# Altium PCB OTTO.PcbDoc (part 1 of 2)
Units mil, origin at the board's own origin, x right, y up, seen from the top; angles counter-clockwise.
Board outline 6000 x 4000 mil, 4 copper layers (Top Layer, Signal Layer 1, Signal Layer 2, Bottom Layer), stack 30.634 mil thick; 140 components, 89 nets, 485 pads, 197 vias.
Unrouted connection lines stored in the file: 9.
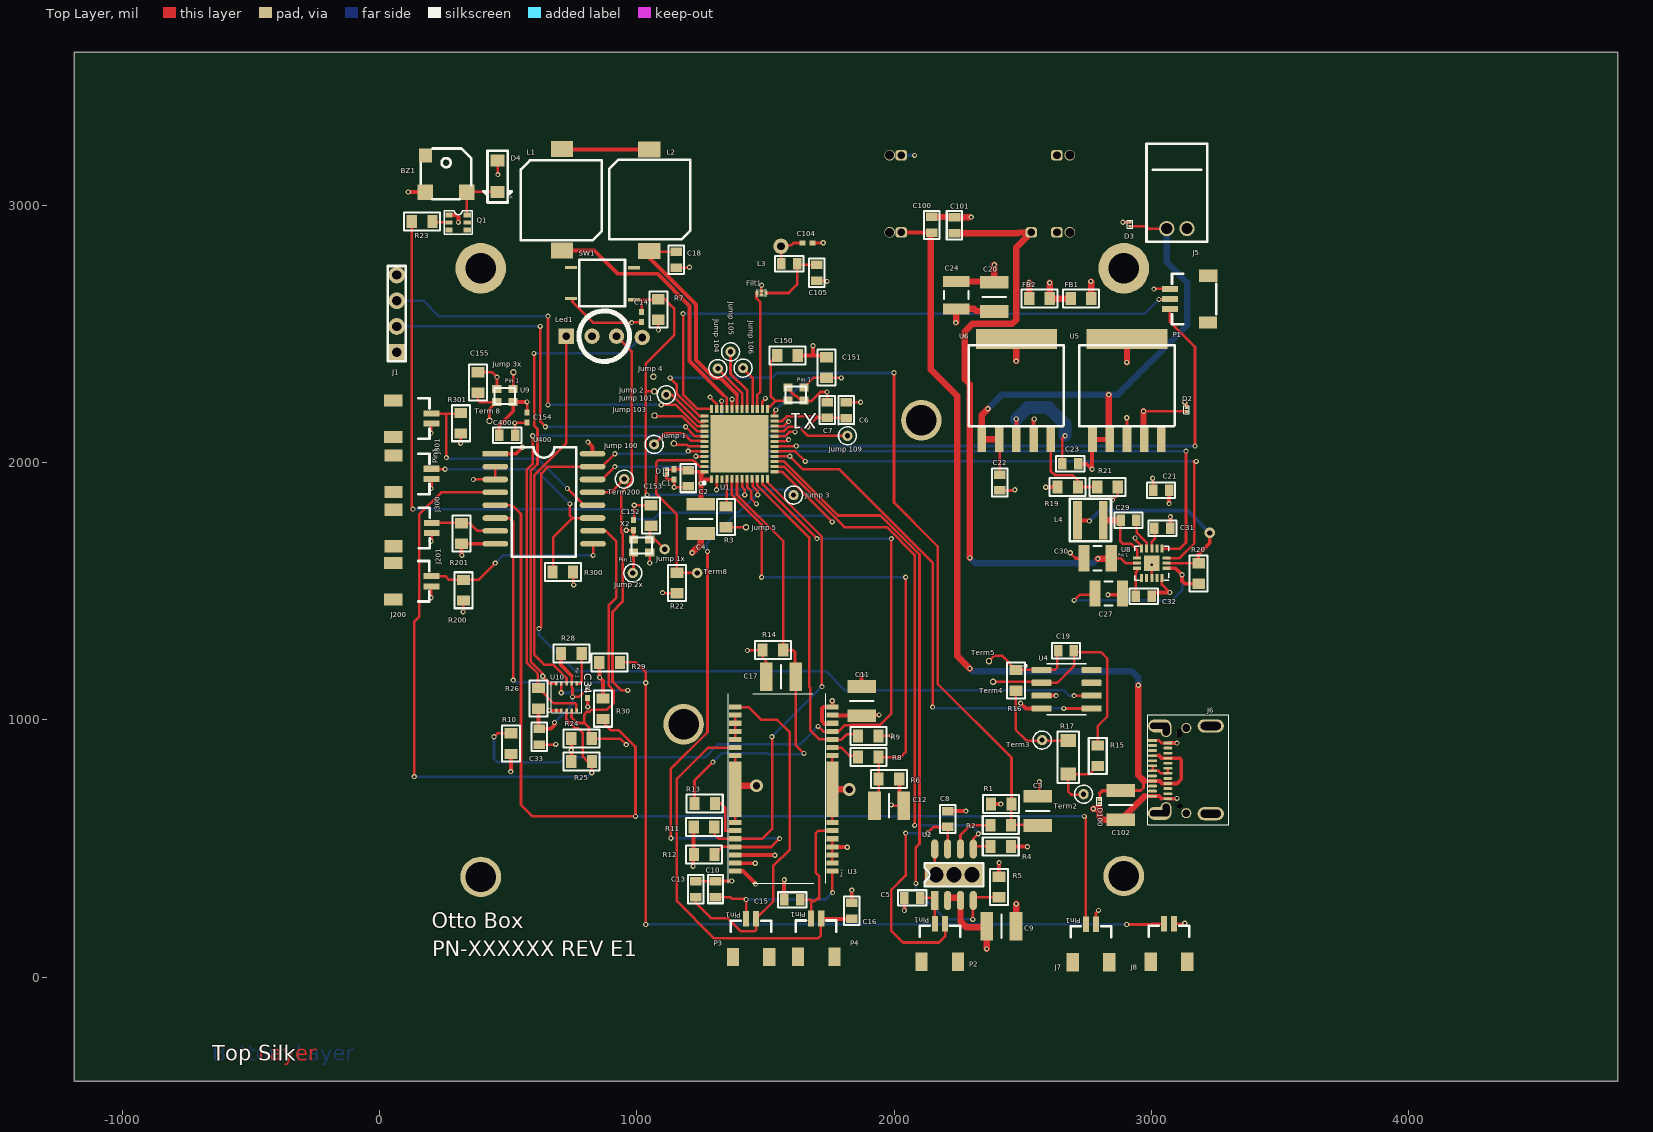
[diagram p0: Top Layer view]
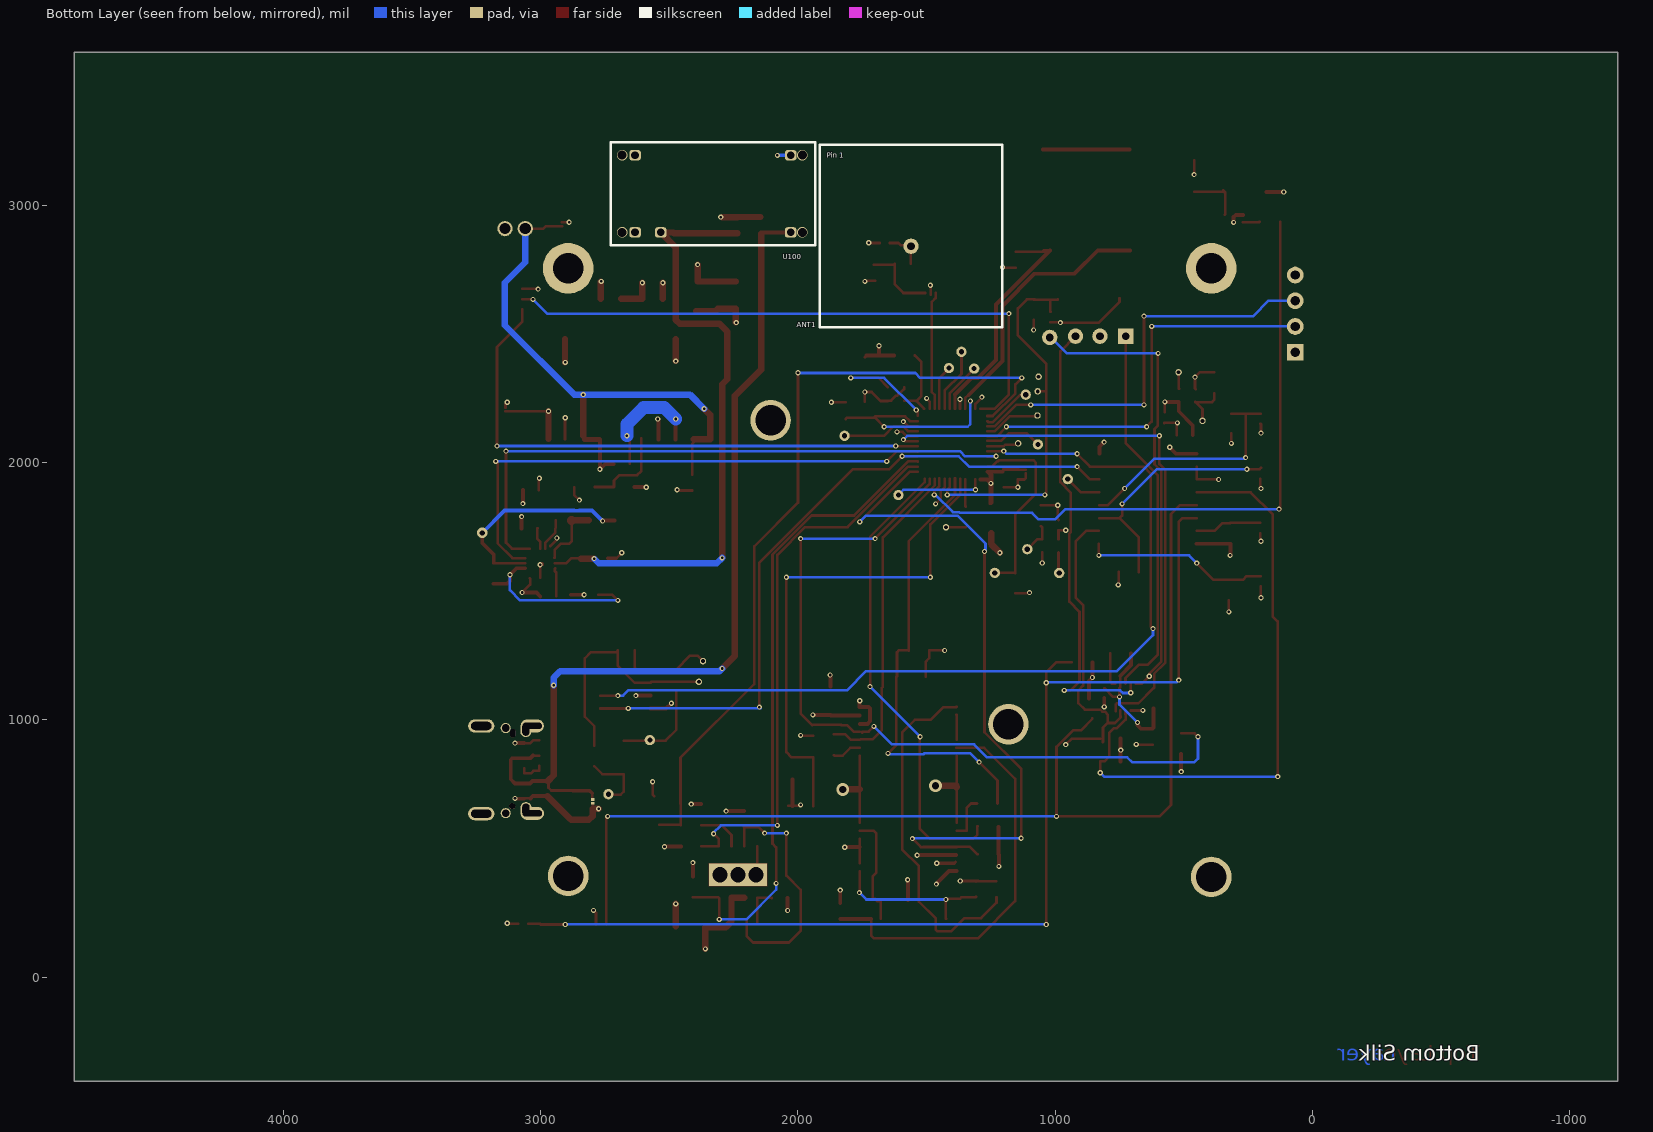
[diagram p1: Bottom Layer view, seen from below]
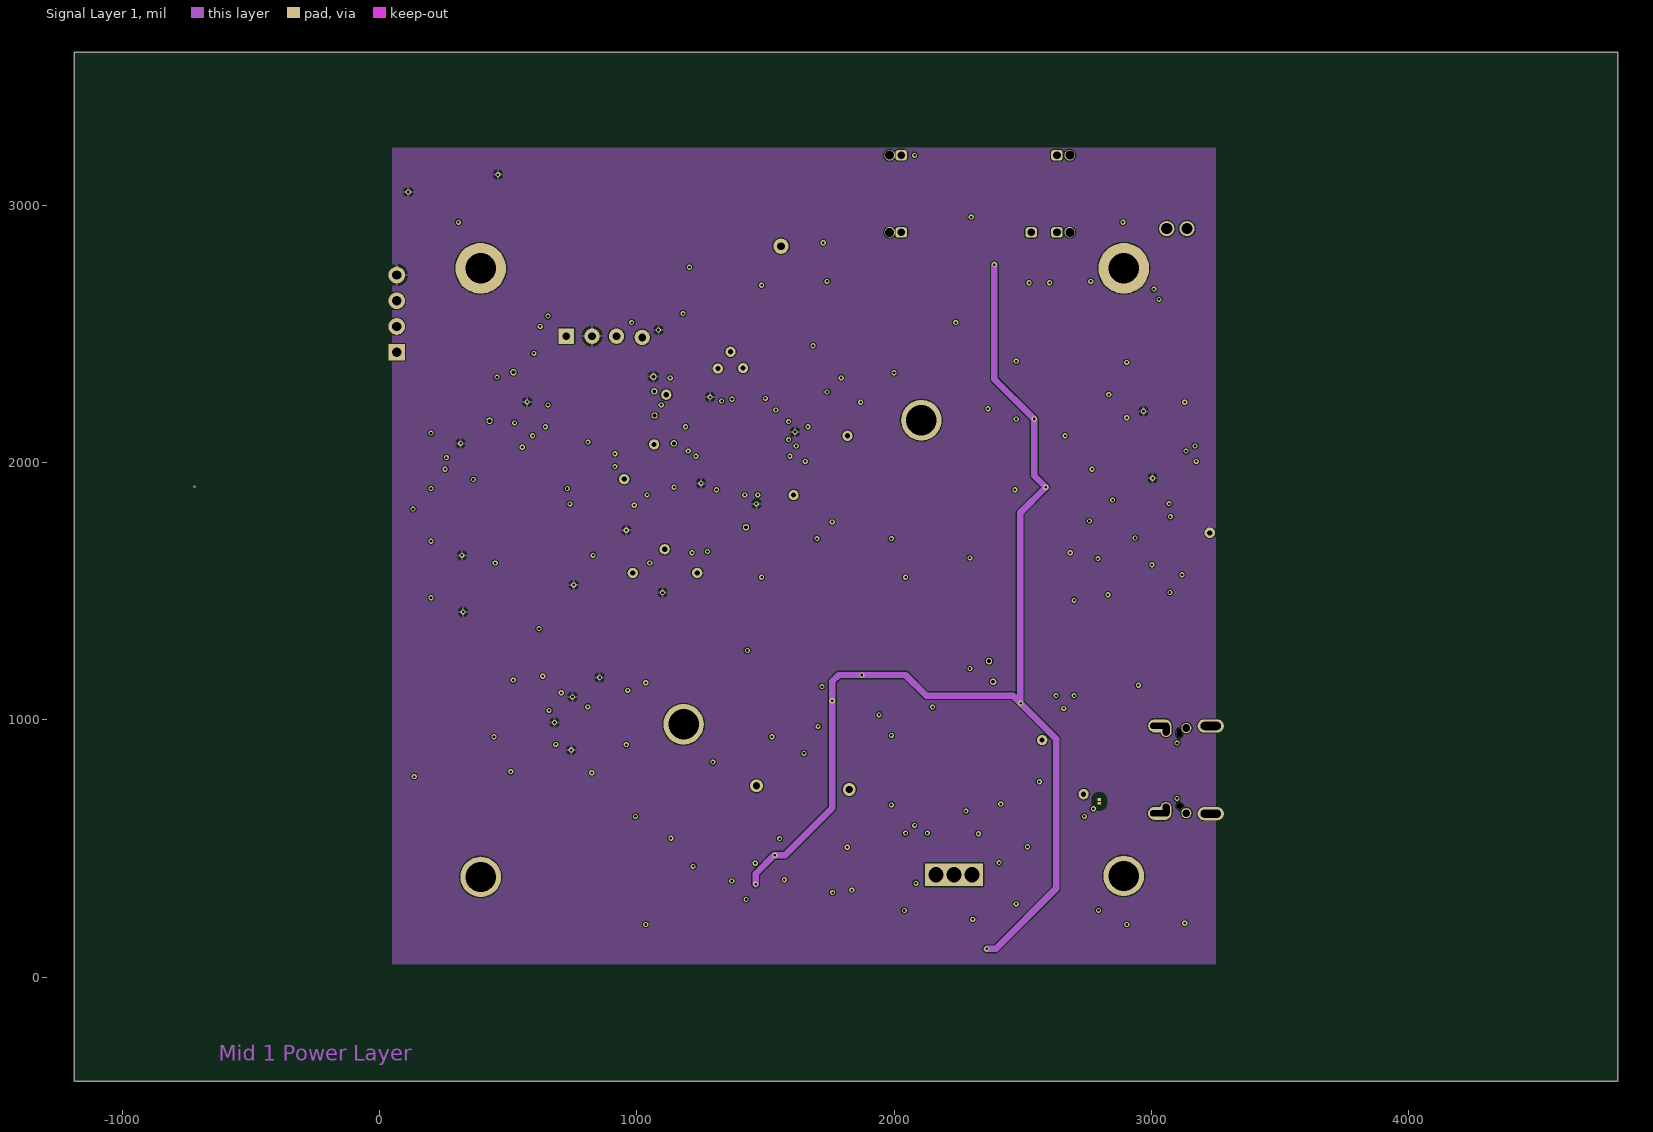
[diagram p2: Signal Layer 1]
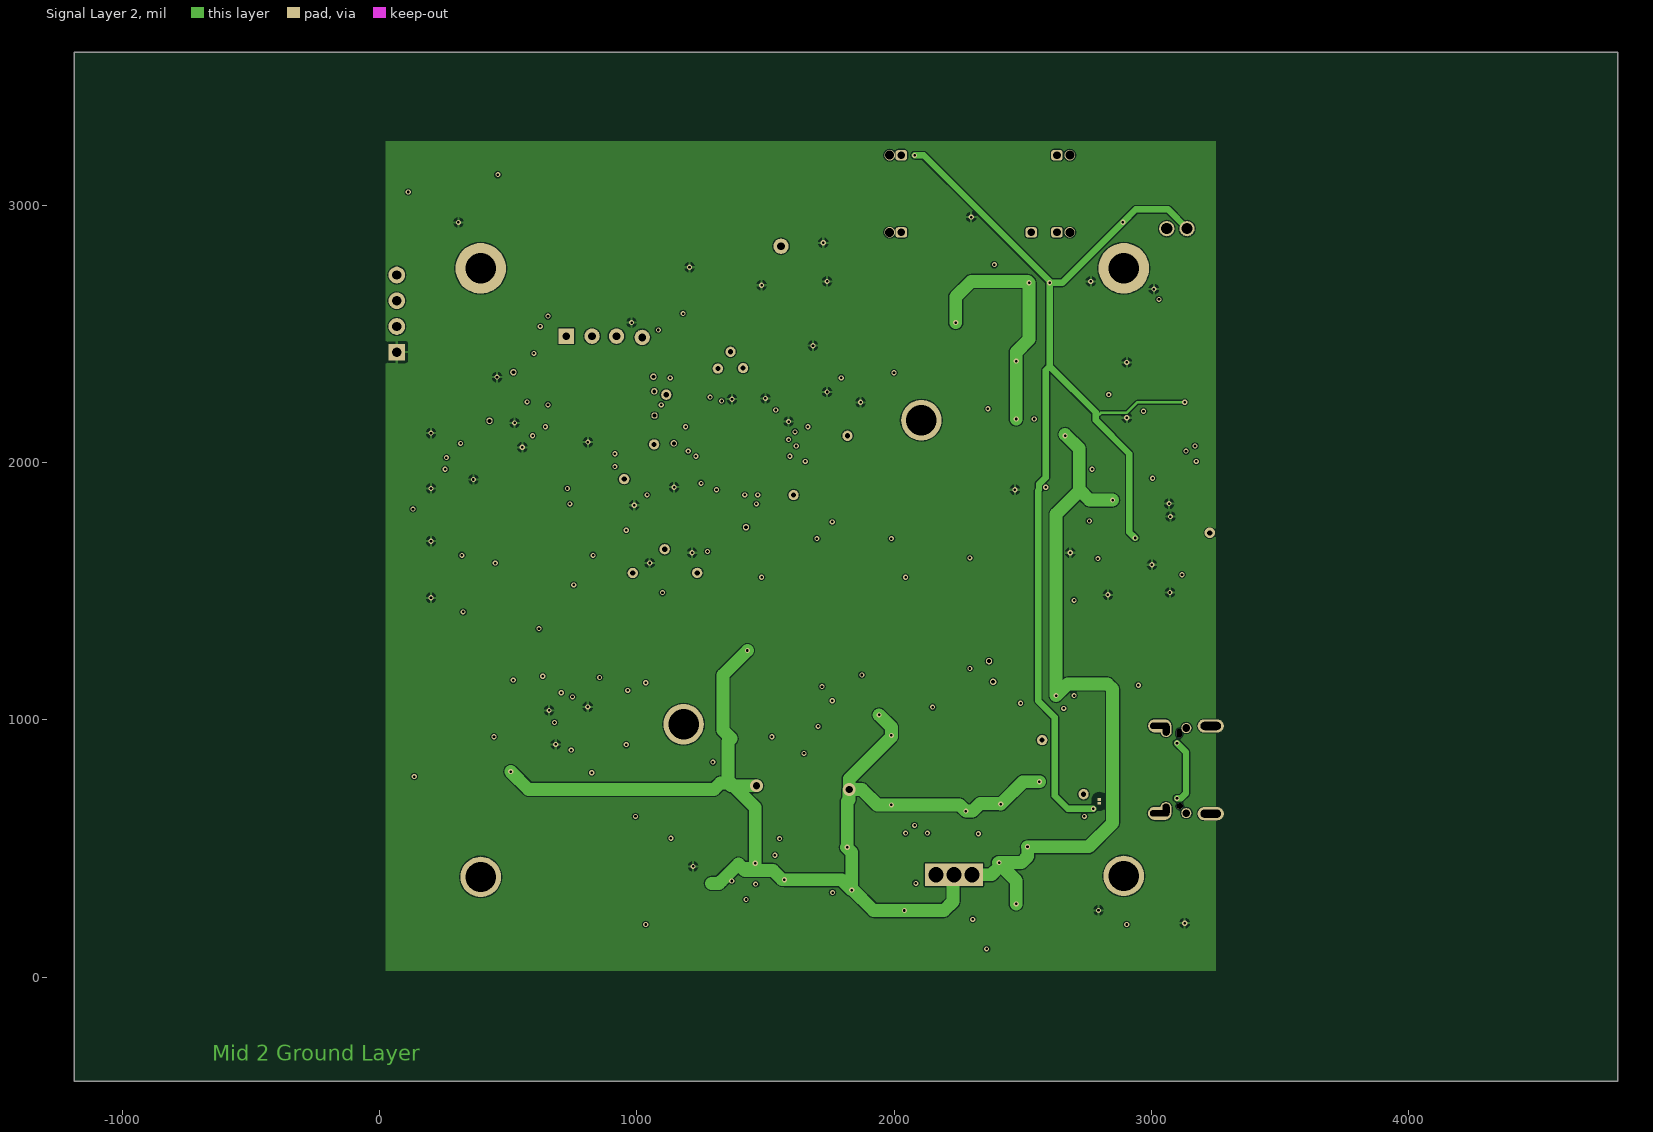
[diagram p3: Signal Layer 2]

## Layer stack, top to bottom
Top Solder: solder mask 0.4, Solder Resist, Dk 3.5
Top Layer: signal copper 1.4
Dielectric 1: core 10, FR-4, Dk 4.2
Signal Layer 1: signal copper 1.417
Dielectric 3: prepreg 5, Dk 4.2
Signal Layer 2: signal copper 1.417
Dielectric 2: core 10, Dk 4.2
Bottom Layer: signal copper 1.4
Bottom Solder: solder mask 0.4, Solder Resist, Dk 3.5

## Board outline
-1186.66,-404.37 4813.34,-404.37 4813.34,3595.63 -1186.66,3595.63

## Design rules (kind name [scope] priority, off if disabled: settings)
Clearance [All] p1: gap=4 ignorepadtopadclearanceinfootprint=FALSE except(0: Arc-Text Arc-Hole Track-Text Track-Hole SMDPad-Text THPad-Text Via-Text Fill-Text Poly-Text Region-Text; 5: SMDPad-Hole THPad-Hole Via-Hole Fill-Hole Poly-Hole Region-Hole Text-Text Text-Hole)
ComponentClearance [All] p1: gap=5 collisioncheckmode=3 verticalgap=8 showdistances=FALSE
HoleToHoleClearance [All] p1: gap=5 allowstackedmicrovias=TRUE
MinimumSolderMaskSliver [All] p1: minsoldermaskwidth=4
NetAntennae [All] p1 off: netantennaetolerance=0
PasteMaskExpansion [All] p1: expansion=4
PlaneClearance [All] p1: clearance=8
PolygonConnect [All] p1: connectstyle=Relief reliefconductorwidth=10 reliefentries=4 polygonreliefangle="90 Angle" airgapwidth=10
RoutingVias [All] p1: holewidth=10 width=20 viastyle="Through Hole" minholewidth=10 minwidth=20 maxholewidth=120 maxwidth=120
SilkToSilkClearance [All] p1: silktosilkclearance=4
SilkToSolderMaskClearance [IsPad] p1: minsilkscreentomaskgap=1 clearancetoexposedcopper=TRUE
SolderMaskExpansion [All] p1: expansion=4 soldermaskfromhole=TRUE
UnRoutedNet [All] p1: checkbadconnections=TRUE
Width [All] p1: maxlimit=50 minlimit=8 preferedwidth=10
21 further rules are at their usual default settings.

## Classes and differential pairs
component class "Otto 2": ANT1 BZ1 C19 C20 C21 C22 C23 C24 C27 C29 C30 C31 C32 C33 C34 C100 C101 C102 C104 C105 C154 C155 C400 D2 D3 D4 D100 FB1 FB2 Filt1 J5 J6 J7 J8 J200 J201 "Jump 3x" L3 L4 Led1 Q1 R15 R16 R17 R19 R20 R21 R22 R23 R24 R25 R26 R28 R29 R30 R200 R201 SW1 Term2 Term3 Term4 Term5 Term8 Term200 "Term 8" U4 U5 U6 U10 U100 U400
component class "Otto 1": C1 C2 C3 C4 C5 C6 C7 C8 C9 C10 C11 C12 C13 C14 C15 C16 C17 C18 C150 C151 C152 D1 J1 J300 J301 "Jump 1" "Jump 2" "Jump 2x" "Jump 3" "Jump 4" "Jump 5" "Jump 100" "Jump 101" "Jump 103" "Jump 104" "Jump 105" "Jump 106" "Jump 109" L1 L2 P1 P2 P4 R1 R2 R3 R4 R5 R6 R7 R8 R9 R10 R11 R12 R14 R300 R301 U1 U2 X1 X2

## Components (designator, comment, footprint, x,y, rotation, side; value= is the part's Value field where it differs from the comment)
ANT1 "Pulse Larsen" "Pulse Larsen - duplicate" 1915.07,2526.78 r180 bottom
BZ1 "BUZZER" BUZZER-smd 258.9,3123.14 r0 top
C1 "0.1uF 25V 10%" 0402 1145,1955 r270 top
C2 "1uF 25V 10%" 0603#1 1200,1940 r270 top
C3 "10uF 25V 10%" BEADC3225X280N 2559,647 r270 top
C4 "10uF 25V 10%" BEADC3225X280N 1249.37,1782.23 r270 top
C5 "1uF 25V 10%" 0603#2 2071.34,307.63 r0 top
C6 "100nF 6.3V 20%" 0603#1 1815,2205 r90 top
C7 "4.7uF 25V 10%" 0603#2 1740.51,2205.06 r270 top
C8 "1uF 25V 10%" 0603#2 2209,615 r90 top
C9 "10uF 25V 10%" BEADC3225X280N 2417.34,198.63 r0 top
C10 "1uF 25V 10%" 0603#2 1305.67,342.55 r270 top
C11 "10uF 25V 10%" BEADC3225X280N 1874,1073 r270 top
C12 "10uF 25V 10%" BEADC3225X280N 1981,666 r180 top
C13 "1uF 25V 10%" 0603#1 1228.96,342.65 r90 top
C14 "0.1uF 25V 10%" 0402 1018.37,2566.58 r270 top
C15 "1uF 25V 10%" 0603#2 1604,300 r0 top
C16 "1uF 25V 10%" 0603#2 1836,258 r90 top
C17 "10uF 25V 10%" BEADC3225X280N 1560.81,1167.57 r0 top
C18 "4.7uF 25V 10%" 0603#2 1153.2,2788.88 r90 top
C19 "1uF 25V 10%" 0603#2 2668.62,1268.77 r0 top
C20 "10uF 25V 10%" BEADC3225X280N 2389.98,2644.86 r270 top
C21 "4.7uF 25V 10%" 0603#2 3038.16,1893.94 r180 top
C22 "4.7uF 25V 10%" 0603#2 2410.83,1923.2 r90 top
C23 "0.33uF 25V 10%" 0603#2 2685.13,1995.24 r0 top
C24 "22uF 25V 10%" C1210 2241.43,2651.5 r90 top
C27 "22uF 25V 10%" C1210 2834.5,1491.57 r180 top
C29 "100nF 6.3V 20%" 0603#2 2911.5,1776.57 r180 top
C30 "22uF 25V 10%" C1210 2791.5,1628.57 r0 top
C31 "1uF 25V 10%" 0603#2 3043.5,1744.57 r0 top
C32 "1uF 25V 10%" 0603#1 2971.13,1480.24 r0 top
C33 "1uF 25V 10%" 0603#2 621.25,935.13 r90 top locked
C34 "0.1uF 25V 10%" 0402 809.25,1104.45 r270 top
C100 "4.7uF 25V 10%" 0603#1 2145.87,2924.21 r270 top
C101 "2.2uF 25V 10%" 0603#2 2234.72,2923.03 r270 top
C102 "10uF 25V 10%" BEADC3225X280N 2881.81,668.7 r270 top
C104 "1.2pF 25V 10%" 0402 1663.12,2854.35 r0 top
C105 "100pF 200V 5%" 0603#2 1699.8,2738.31 r270 top
C150 "22pF 10V 5%" 0805 1585.63,2416.66 r0 top
C151 "22pF 10V 5%" 0805 1738.34,2370.63 r90 top
C152 "0.1uF 25V 10%" 0402 987.93,1757.13 r90 top
C153 "22pF 10V 5%" 0805 1055.81,1794.53 r90 top
C154 "0.1uF 25V 10%" 0402 574.07,2175.93 r270 top
C155 "22pF 10V 5%" 0805 382.58,2312.26 r90 top
C400 "4.7uF 25V 10%" 0603#1 496.37,2107.34 r180 top
D1 "5.5Vdc Transient Suppressor" TDK-TVS#1 1115.35,1972.18 r0 top
D2 "5.5Vdc Transient Suppressor" TDK-TVS#1 3137.17,2199.8 r180 top
D3 "12Vdc Transient suppressor" VS12BA-TVS 2917.5,2934.57 r0 top
D4 "30V 2A Low Vf Schottky Diode" "SOD 123" 459.14,3114.1 r270 top
D100 "5.5Vdc Transient Suppressor" TDK-TVS#2 2798.43,676.61 r180 top
FB1 "Max DCR 0.05ohm  3A" 0805 2726.5,2637.57 r0 top
FB2 "Max DCR 0.05ohm  3A" 0805 2565.5,2638.57 r180 top
Filt1 "FI105B245024-T Taiyo Yuden 2.45gHz CF" Filter 1465,2670 r0 top
J1 "ST Link Conn" CONN-4 66.91,2579.93 r90 top
J5 "2 Pin 7.4Vdc Battery Connector" "GTK 2 pin Batt  RA" 3060.32,2910.01 r180 top
J6 "RCPT Top Mount R/A C Type" C-Conn 3302,593 r90 top locked
J7 "1mm 2 pin R/A pin Conn" GTK-2 2745.98,206.43 r180 top
J8 "1mm 2 pin R/A pin Conn" GTK-2 3049.19,208.13 r180 top
J200 "1mm 2 pin R/A pin Conn" GTK-2 201.69,1559.06 r90 top
J201 "1mm 2 pin R/A pin Conn" GTK-2 202.92,1765.95 r90 top
J300 "1mm 2 pin R/A pin Conn" GTK-2 202.2,1976.67 r90 top
J301 "1mm 2 pin R/A pin Conn" GTK-2 202.07,2191.19 r90 top
"Jump 1" "Hook Up Terminal" Pad#1 1144.02,2075.35 r90 top
"Jump 1x" "Hook Up Terminal" Pad#2 1108.5,1663.76 r90 top
"Jump 2" "Hook Up Terminal" Pad#1 1068.01,2277.57 r90 top
"Jump 2x" "Hook Up Terminal" Pad#3 1057.5,1737.31 r90 top
"Jump 3" "Hook Up Terminal" Pad#3 1682.65,2040.37 r90 top
"Jump 3x" "Hook Up Terminal" Pad#1 520.39,2351.63 r90 top
"Jump 4" "Hook Up Terminal" Pad#1 1064.57,2334.53 r90 top
"Jump 5" "Hook Up Terminal" Pad#1 1424.68,1749.12 r90 top
"Jump 100" "Hook Up Terminal" Pad#3 1140.46,2237.29 r90 top
"Jump 101" "Hook Up Terminal" Pad#3 1187.5,2430.53 r90 top
"Jump 103" "Hook Up Terminal" Pad#1 1069.02,2183.6 r90 top
"Jump 104" "Hook Up Terminal" Pad#3 1388.17,2532.18 r90 top
"Jump 105" "Hook Up Terminal" Pad#3 1437.46,2597.26 r90 top
"Jump 106" "Hook Up Terminal" Pad#3 1486.24,2533.97 r90 top
"Jump 109" "Hook Up Terminal" Pad#3 1892.03,2270.8 r90 top
L1 "MSS7348-103MEC 10uH 3A 45mohm DCR" "Coilcraft 7x7 Inductor" 740.9,2956.78 r90 top locked
L2 "MSS7348-103MEC 10uH 3A 45mohm DCR" "Coilcraft 7x7 Inductor" 1017.03,3086.65 r270 top
L3 "3.9uH  2.45G Resonant 680mA 190mOhm DCR" 0603#1 1592.98,2772.76 r0 top
L4 "PM5430.472NLT  4.7uH 5.1A 44.1 DCR" "Pulse 3A5430" 2843.5,1695.57 r90 top
Led1 "RGB LED" "4P RGB LED" 866.14,2492.13 r0 top locked
P1 "1mm  3 pin R/A pin Conn" "GTK 3pin 1mm Header" 3075.57,2596.93 r270 top
P2 "1mm 2 pin R/A pin Conn" GTK-2 2158.66,208.37 r180 top
P3 "1mm 2 pin R/A pin Conn" GTK-2 1424.66,227.37 r180 top
P4 "1mm 2 pin R/A pin Conn" GTK-2 1677.66,228.37 r180 top
Q1 "NPN (Dual) 45V 100mA" SOT-363 305.9,2934.14 r0 top
R1 "33k 5% 1/8W" 0805 2416.66,674.37 r180 top
R2 "1k 5% 1/8W" 0805 2415,590.65 r0 top
R3 "10K OHM 5% 1/8W" 0805 1347.72,1789.66 r90 top
R4 "100k 5% 1/8W" 0805 2415,508 r0 top
R5 "100k 5% 1/8W" 0805 2408,351 r270 top
R6 "33k 5% 1/8W" 0805 1980,770 r0 top
R7 "10K OHM 5% 1/8W" 0805 1083.3,2595.43 r270 top
R8 "1k 5% 1/8W" 0805 1900,856 r0 top
R9 "100k 5% 1/8W" 0805 1900,938 r0 top
R10 "100k 5% 1/8W" 0805 510.25,908.13 r270 top
R11 "100k 5% 1/8W" 0805 1261.17,582.97 r0 top locked
R12 "100k 5% 1/8W" 0805 1262.13,477.28 r0 top locked
R13 "1k 5% 1/8W" 0805 1264.1,675.87 r180 top locked
R14 "33k 5% 1/8W" 0805 1529.01,1271.94 r180 top
R15 "10 OHM 1% 1/8W" 0805 2791.62,860.77 r270 top
R16 "10 OHM 1% 1/8W" 0805 2473.65,1154.11 r270 top
R17 "Shunt Resistor 2.0M" 2512 2677.33,789.74 r90 top
R19 "7.5K 1% 1/8W" 0805 2675.16,1905.94 r180 top
R20 "25mohm 1% 1/8W" 0805 3184.84,1569.57 r90 top
R21 "2.0K 1% 1/8W" 0805 2829.83,1905.2 r0 top
R22 "10K 5% 1/8W" 0805 1156.02,1532.91 r90 top
R23 "150 OHM 1% 1/8W" 0805 165.56,2937.51 r180 top
R24 "4.7K 1/8W" 0805 785.25,928.13 r180 top
R25 "4.7K 1/8W" 0805 785.62,839.47 r180 top
R26 "4.7K 1/8W" 0805 617.25,1084.13 r270 top
R28 "10K OHM 5% 1/8W" 0805 745.62,1259.47 r180 top
R29 "10K 5% 1/8W" 0805 894.62,1224.47 r180 top
R30 "10K 5% 1/8W" 0805 869.59,1043.76 r90 top
R200 "10K 5% 1/8W" 0805 325.66,1504.37 r270 top
R201 "10K 5% 1/8W" 0805 318.62,1725.24 r270 top
R300 "10K 5% 1/8W" 0805 712.39,1575.12 r0 top
R301 "10K 5% 1/8W" 0805 315.59,2153.59 r270 top
SW1 "TL3305BF160QG" Switch 733.63,2638.98 r0 top locked
Term2 "Hook Up Terminal" Pad#3 2809.98,877.49 r90 top
Term3 "Hook Up Terminal" Pad#3 2648.95,1087.96 r90 top
Term4 "Hook Up Terminal" Pad#1 2385.5,1148.4 r90 top
Term5 "Hook Up Terminal" Pad#1 2369.33,1228.74 r90 top
Term8 "Hook Up Terminal" Pad#2 1234.87,1571.82 r90 top
Term200 "Hook Up Terminal" Pad#3 1024.2,2102.29 r90 top
"Term 8" "Hook Up Terminal" Pad#1 427.55,2162.95 r90 top
U1 "STM32WB35" QFN50P700X700X65-49N-D 1399.37,2073.34 r90 top locked
U2 "BD6231F-E2" SOP-8 2158.37,298.34 r90 top
U3 "Comment" HSOP-M28 1544.29,353.35 r90 top locked
U4 "1NA219" INA219 2551.33,1189.74 r0 top
U5 "BA33DD0WHFP-TR" HRP-5 2720.56,2142.2 r0 top locked
U6 "BA00DD0WHFP-TR" HRP-5 2290.56,2142.2 r0 top
U8 "Comment" QFN-16 3307.09,1719.49 r0 top
U9 "32KHz" "XTAL AND OSC" 533.72,2350.14 r180 top
U10 "IS31L3193 or 194" DFN-10 666.88,1147.8 r270 top locked
U100 "Mornsun DCDC Converter" B0509D-2WR3 1933.39,3245.53 r0 bottom locked
U400 "PCF8574" SOIC-16 639.06,1810.02 r0 top locked
X1 "32mHz" "XTAL AND OSC" 1665.63,2356.07 r180 top
X2 "32KHz" "XTAL AND OSC" 972.17,1587.83 r0 top

## Footprints (in the part's own frame and the unit in brackets; to place one, negate y for a bottom-side part, rotate by r counter-clockwise, add the part's x,y. Pads: shape width x height; smd on the part's side, far side on the other; paste and mask are expansions set on the pad)
"4P RGB LED" [mil]
  rect 60x60 hole 30: 1(-140,0)
  round 60 hole 30: 2(-40,0) 3(55,0) 4(155,-5)
  silkscreen extent -91,-98 106,98
0402 [mm] "Chip Capacitor, Body 1.0x0.5mm, IPC High Density"
  rect 0.6x0.5 smd: 1(-0.5,0) 2(0.5,0)
  body extent -0.55,-0.3 0.55,0.3, height 1.3
0603#1 [mil]
  rect 33x45 smd: 1(-31.26,0.4) 2(30.74,0.4)
  silkscreen extent -55,-30 55,30
0603#2 [mil]
  rect 33x45 smd: 1(-31,0.35) 2(31,0.35)
  silkscreen extent -55,-30 55,30
0805 [mil]
  rect 40x50 smd: 1(-40,0.35) 2(40,0.35)
  silkscreen extent -70,-35 70,35
2512 [mil]
  rect 50x60 smd: 1(0,0) 2(130,0)
  silkscreen extent -35,-41 165,41
B0509D-2WR3 [mil] "Mornsun DC-DC Converter"
  rrect50% 45x40 hole 30: 1(95,50) 7(700,50) 8(700,350) 9(600,350) 14(95,350)
  silkscreen extent 0,0 795,400
BEADC3225X280N [mm]
  rect 1.25x2.8 smd: 1(-1.45,0) 2(1.45,0)
  silkscreen extent 0,-1.15 0,1.15, body extent -1.6,-1.25 1.6,1.25, height 2.8
BUZZER-smd [mm]
  rect 1.27x1.397 smd: 0(-2.05,1.8)
  rect 1.524x1.524 smd: 1(2.05,-1.8) 2(-2.05,-1.8)
  silkscreen extent -2.5,-2.5 2.5,2.5
C1210 [mm] "Chip Capacitor, Body 3.2x2.5mm, IPC High Density"
  rect 1.1x2.6 smd: 1(-1.35,0) 2(1.35,0)
  silkscreen extent -0.4,-1.2 0.4,1.2
C-Conn [mm] "GTK Type C Connector"
  oval 1.3x2.6 hole 0.8 slot 2 at 90 deg: 1(1.086,1.8) 2(9.746,1.8)
  round 0.6 hole 0.6: 3(1.826,4.855)
  oval 1.3x2.3 hole 0.6 slot 1.9 at 90 deg: 4(1.116,6.84) 6(9.756,6.83)
  oval 1.5x1.1 hole 0.7 slot 1.2 at 0 deg: 5(1.476,6.21) 7(9.396,6.2)
  oval 0.85x0.5 hole 0.5 slot 0.85 at 0 deg: 8(9.026,4.915)
  oval 0.27x0.9 smd: A1(2.816,7.54) A2(3.316,7.54) A3(3.816,7.54) A4(4.316,7.54) A5(4.816,7.54) A6(5.316,7.54) A7(5.816,7.54) A8(6.316,7.54) A9(6.816,7.54) A10(7.316,7.54) A11(7.816,7.54) B2(7.566,6.035) B3(7.066,6.035) B4(6.566,6.035) B5(6.066,6.035) B6(5.566,6.035) B7(5.066,6.035) B8(4.566,6.035) B9(4.066,6.035) B10(3.566,6.035) B11(3.066,6.035) B12(2.566,6.035)
  rect 0.27x0.9 smd: A12(8.316,7.54) B1(8.066,6.035)
  silkscreen extent 0,0 10.86,8
"Coilcraft 7x7 Inductor" [mm]
  rect 1.6x2.2 smd: 1(6.69,0.796) 2(-3.343,0.796)
  silkscreen extent -2.33,-3.14 5.55,4.86
CONN-4 [mil]
  rect 65x65 hole 36: 1(-150.21,-0.27)
  round 65 hole 36: 2(-50.21,-0.27) 3(49.79,-0.27) 4(149.79,-0.27)
  silkscreen extent -185,-35 185,35
DFN-10 [mm]
  rect 0.4x0.25 smd: 1(0.153,2.54) 2(0.153,2.032) 3(0.153,1.524) 4(0.153,1.016) 5(0.153,0.508) 6(2.82,0.508) 7(2.82,1.016) 8(2.82,1.524) 9(2.82,2.032) 10(2.82,2.54)
  silkscreen extent 0,0 3.05,3.05
Filter [mm] "Taiyo Uden 4 pin SMD"
  rect 0.3x0.4 smd: 1(0.038,-0.269) 4(0.964,-0.269)
  rect 0.4x0.3 smd: 2(0.488,-0.055) 3(0.486,-0.445)
  silkscreen extent 0,-0.55 1,0.05
"GTK 2 pin Batt  RA" [mm] "GTK 2 Pin R/A 2.0MM WTBM-02S-TH1T-R"
  round 1.5 hole 1.1: 1(0,0) 2(-2,0)
  silkscreen extent -4,-8.4 2,1.3
"GTK 3pin 1mm Header" [mm] "3 pin RA GTK"
  rect 1.2x1.8 smd: 0(-3.3,3.7) 0(1.3,3.697)
  rect 0.6x1.55 smd: 1(0,-0.073) 2(-1,-0.073) 3(-2,-0.073)
  silkscreen extent -3.5,0.13 1.5,4.5
GTK-2 [mm] "SMT  2 pin connector"
  rect 1.2x1.8 smd: 0(-2.3,3.77) 0(1.3,3.77)
  rect 0.6x1.55 smd: 1(0,0) 2(-1,0)
  silkscreen extent -2.5,0.2 1.5,1.3
HRP-5 [mm]
  rect 0.85x2.5 smd: 1(1.3,-1.3) 2(3,-1.3) 3(4.7,-1.3) 4(6.4,-1.3) 5(8.1,-1.3)
  rect 8x2 smd: 6(4.7,8.6)
  silkscreen extent 0,0 9.4,8
HSOP-M28 [mm]
  rect 0.5x1.2 smd: 1(1.5,-5.5) 2(2.3,-5.5) 3(3.1,-5.5) 4(3.9,-5.5) 5(4.7,-5.5) 6(5.5,-5.5) 7(6.3,-5.5) 8(12.9,-5.5) 9(13.7,-5.5) 10(14.5,-5.5) 11(15.3,-5.5) 12(16.1,-5.5) 13(16.9,-5.5) 14(17.7,-5.5) 15(17.7,4.1) 16(16.9,4.1) 17(16.1,4.1) 18(15.3,4.1) 19(14.5,4.1) 20(13.7,4.1) 21(12.9,4.1) 22(6.3,4.1) 23(5.5,4.1) 24(4.7,4.1) 25(3.9,4.1) 26(3.1,4.1) 27(2.3,4.1) 28(1.5,4.1)
  rect 5.5x1.2 smd: Tab1(9.6,-5.5) Tab2(9.6,4.1)
  silkscreen extent 0.3,-4.81 19,4.81
INA219 [mm]
  rrect25% 1.97x0.6 smd: 1(0.562,0.127) 2(0.562,-1.143) 3(0.562,-2.413) 4(0.562,-3.683) 5(5.502,-3.683) 6(5.502,-2.413) 7(5.502,-1.143) 8(5.502,0.127)
  silkscreen extent -1.11,-4.3 4.98,0.75
Pad#1 [mil]
  round 25 hole 15: 1(0,0)
Pad#2 [mil]
  round 40 hole 20: 1(0,0)
Pad#3 [mil]
  round 40 hole 20: 1(-166,73)
  silkscreen extent -201,38 -131,108
"Pulse 3A5430" [mil]
  rect 149.61x34.65 smd: 1(80,30) 2(80,130)
  silkscreen extent 0,0 165,160
"Pulse Larsen - duplicate" [mil]
  round 60 hole 30: 1(354.33,314.96)
  silkscreen extent 0,0 709,709
QFN50P700X700X65-49N-D [mm] "ST Micro MCU"
  rect 0.762x0.305 smd: 1(-3.501,2.747) 2(-3.475,2.239) 3(-3.501,1.731) 4(-3.45,1.25) 5(-3.45,0.75) 6(-3.45,0.25) 7(-3.45,-0.25) 8(-3.45,-0.75) 9(-3.45,-1.25) 10(-3.45,-1.75) 11(-3.45,-2.25) 12(-3.45,-2.75) 25(3.45,-2.75) 26(3.45,-2.25) 27(3.45,-1.75) 28(3.45,-1.267) 29(3.45,-0.759) 30(3.45,-0.251) 31(3.45,0.25) 32(3.45,0.739) 33(3.45,1.25) 34(3.45,1.75) 35(3.45,2.25) 36(3.45,2.75)
  round 0 smd: 1(-3.45,2.75) 2(-3.45,2.25) 3(-3.45,1.75) 21(1.25,-3.45) 24(2.75,-3.45) 28(3.45,-1.25) 29(3.45,-0.75) 30(3.45,-0.25) 32(3.45,0.75)
  round 0.3 smd: 4(-3.45,1.25)
  rect 0.305x0.762 smd: 13(-2.75,-3.45) 14(-2.25,-3.45) 15(-1.75,-3.45) 16(-1.25,-3.45) 17(-0.75,-3.45) 18(-0.25,-3.45) 19(0.25,-3.45) 20(0.75,-3.45) 21(1.259,-3.45) 22(1.75,-3.45) 23(2.25,-3.45) 24(2.758,-3.45) 37(2.75,3.45) 38(2.25,3.45) 39(1.75,3.45) 40(1.25,3.45) 41(0.75,3.45) 42(0.25,3.45) 43(-0.25,3.45) 44(-0.75,3.45) 45(-1.25,3.45) 46(-1.75,3.45) 47(-2.25,3.45) 48(-2.75,3.45)
  rect 5.7x5.7 smd: 49(0,0)
  silkscreen extent -4,3.37 -3.75,3.62
QFN-16 [mm]
  rect 0.805x0.3 smd: 1(-9.199,-2.294) 2(-9.199,-2.794) 3(-9.199,-3.294) 9(-6.295,-3.294) 10(-6.295,-2.794) 11(-6.295,-2.294)
  rect 0.3x0.805 smd: 4(-8.756,-4.249) 5(-8.247,-4.246) 6(-7.747,-4.246) 7(-7.247,-4.246) 8(-6.747,-4.246) 12(-6.756,-1.345) 13(-7.247,-1.342) 14(-7.747,-1.342) 15(-8.247,-1.342) 16(-8.747,-1.342)
  rect 1.55x1.55 smd: U8(-7.747,-2.794)
  silkscreen extent -9.42,-4.47 -6.07,-1.12
"SOD 123" [mm] "On Semi 2A Low VF"
  rect 1.2x1.4 smd: 1(-1.55,0) 2(1.55,0)
  silkscreen extent -2.5,-1.4 2.6,1.4
SOIC-16 [mil]
  rect 100x22 smd: 1(-188.98,225)
  oval 100x22 smd: 2(-188.98,175) 3(-188.98,125) 4(-188.98,75) 5(-188.98,25) 6(-188.98,-25) 7(-188.98,-75) 8(-188.98,-125) 9(191.02,-125) 10(191.02,-75) 11(188.98,-25) 12(188.98,25) 13(188.98,75) 14(188.98,125) 15(188.98,175) 16(188.98,225)
  silkscreen extent -126,-175 125,250
SOP-8 [mil]
  rect 75x28 smd: 1(0,0)
  oval 75x28 smd: 2(0,-50) 3(0,-100) 4(0,-150) 5(200,-150) 6(200,-100) 7(200,-50) 8(200,0)
  rect 86.61x86.61 hole 59.06: 9(100,-75) 9(100,-5) 9(100,-145)
  Top Layer region: 55,-190 145,-190 145,40 55,40
  silkscreen extent 55,-190 145,40
SOT-363 [mm]
  rect 0.711x0.5 smd: 1(-0.9,0.75) 3(-0.9,-0.75) 4(0.9,-0.75) 6(0.9,0.75)
  rect 0.711x0.4 smd: 2(-0.9,0) 5(0.9,0)
  silkscreen extent -1.4,-1.14 1.4,1.14
Switch [mm]
  rect 1.2x0.3 smd: 1(0.254,0) 2(6.477,-0.135) 3(0.254,3.032) 4(6.477,3.024)
  silkscreen extent 1.1,-0.76 5.6,3.81
TDK-TVS#1 [mm]
  rect 0.35x0.28 smd: 1(0,0) 2(0,-0.35)
  silkscreen extent -0.25,-0.57 0.25,0.22
TDK-TVS#2 [mm]
  rect 0.35x0.28 all layers, no hole: 1(0,0) 2(0,-0.35)
  silkscreen extent -0.25,-0.57 0.25,0.22
VS12BA-TVS [mm]
  rect 0.31x0.23 smd: 1(0,0) 2(0,-0.38)
  silkscreen extent -0.25,-0.6 0.25,0.2
"XTAL AND OSC" [mm]
  rect 0.9x0.8 smd: 1(0.383,1.606) 2(1.988,1.606) 3(1.988,2.903) 4(0.383,2.903)
  silkscreen extent 0.2,1.5 2.2,3.1

## Part data
ANT1: library part ANT, "W3230 Pulse Larsen BLE 2.5Ghz 2.57 at Digikey"
BZ1: "KLJ-5030 (Keliking) 4kHz Buzzer 71 cents from LcSc.com"
C1 C14 C34 C152 C154: library part CAP, "TMK105BJ104KV8F Taiyo Uden 0.1uF 25V 10% 2.3 cents at Mouser"
C2 C5 C8 C10 C13 C15 C16 C19 C31 C32 C33: library part CAP, "CC0603KRX5R8BB105 1uf 25V 10% Yageo 3 cents at Mouser"
C3 C4 C9 C11 C12 C17 C20 C102: library part CAP, "CC1210KFX7R8BB106 Yageo 10uF 25V 10% 23 cents at Mouser"
C6: library part CAP, "06036C104MAZ2A Kyocera 100nf 6.3V 20% 12 cents at Mouser"
C7 C18 C21 C22 C100 C400: library part CAP, "GRM188R61E475KE11D Murata 4.7uF 25V 10% 7.9 centsat Mouser"
C23: library part CAP, "C1608X7R1E334K080AC 0.33uF 25V 10% 2.8 cents at Mouser"
C24 C27 C30: library part CAP, "TMK325B7226KM8P Taito Uden 22uF 25V X7R 10%    47cents at Mouser"
C29: library part CAP, "06036C104MAZ2A Kyocera 100nf 6.3V 20% 12 cents at Mouse"
C101: library part CAP, "GRM188C71E225KE11J 2.2uF 25V 10% 0.19 usd @digikey"
C104: library part CAP, "VJ0402A1R2BXXCW1BC  Vishay 13 cents at Mouser"
C105: library part CAP, "C0603C101J2GACAUTO Kemet 5% 200V 0603 12 cents at Mouser"
C150 C151 C153 C155: library part CAP, "C0805C220J8GACAUTO Kemet 0805 22pF 5% 7 cents at Mouser"
D1 D2 D100: library part X1-DFN1006-2, "B74111U0055M060  TDK 5.5vdc Supressor 3cents at Mouser"
D3: library part VS12VBA1HST15R, "VS12VBA1HST15R  Rohm 12Vdc Transient Supressor 5cents at Digikey"
D4: library part "DIODE SCHOTTKY", "MBR230LSFT1G On Semi 2A 30V Diode SOD 123 23 cents at Newark"
FB1 FB2: library part "FERRITE BEAD", "2508051217Z3 (Fair-Rite) 4.8 cents at Mouser", Text Field1="SMT Ferrite Bead"
Filt1: library part "Filter RF", "FI105B245024-T Taiyo Uuden RF 2.45gHz  Filter 4 pin smd 37 cents at Digikey"
J1: library part CON4, "Standard 0.1in center terminal strip"
J5: library part "2 PIN .1\"  HDR", "640457-2  TE Connectivity 2 pin r-a battery conn 8.6cents at Mouser"
J6: library part "C-Type Conn", "USB3CF24M-H05 (HJC Conectors)"
J7 J8 J200 J201 J300 J301: library part "2 PIN .1mm GTK Receptacle_1", "WTBI-02S-CF3-R 5 pin R-A 1mm center GTK Receptacle"
L1 L2: library part INDUCTOR2, "MSS7348-103MEC Coilcraft 10uH 3A 45mohm DCR 80cents at Mouser"
L3: library part INDUCTOR2, "0603HP-39NXGLU CoilCraft  190mOhm 680mA 2.45Ghz Resonant"
L4: library part INDUCTOR2, "PM5430.472NLT  4.7uH 5.1A 44.1 DCR Ohms 20% 80 Cents at Digikey"
Led1: "521-8559F Dialight $p RGB 5mm Common Anode through hole 26 cents at Mouser"
P1: library part "UART Xcvr Conn", "GTK WTBI-03S-SMH1T-R3 pin R-A 1mm center GTK Header"
P2 P4: library part "2 PIN .1mm GTK Header", "WTBI-02S-SMH1T-R 2pin R-A 1mm center GTK Header"
P3: library part "2 PIN .1mm GTK Header", "WTBI-02S-SMH1T-R  2pin R-A 1mm center GTK Header"
Q1: library part SOT-363, "BC847BS,115 Nexperia Dual NPN 8.9cents at Mouser"
R1 R6 R14: library part RES1, "CR0805-JW-333ELF Bourns 33k 5% .125 4 cents at Mouser"
R2 R8 R13: library part RES1, "CR0805-JW-102ELF Bourns1k 5% .125A 0.5centsat Mouser"
R3 R7 R22 R29 R30 R200 R201 R300 R301: library part RES1, "CRCW080510K0JNEAC  5% .125 .8cents at Mouser"
R4: library part RES1, "CRCW0805100KJNEAC Vishay 100k .125 5% 1.6 cents at Digikey"
R5 R9 R10 R11 R12: library part RES1, "need mew pn --- 0805FR-07150RL (Yageo)"
R15 R16: library part RES1, "CMP0805-FX-10R0ELF Bournes 10 ohm 1% .125 2.4 cents at Mouser"
R17: library part RES1, "PSR100KTQFJ2L00 64cents at Mouser"
R19: library part RES1, "KTR10EZPF7501 Rohm 7,5K 1% 3 cents at Mouser"
R20: library part RES1, "CRF0805-FZ-R025ELF 25mohm 1% Current Shunt Resistor 16 cents at Mouser"
R21: library part RES1, "SDR10EZPF2001 Rohm 2.0k 1% 2.1 cents at Mouser"
R23: library part RES1, "RC0805FR-07150RL  Yageo 150ohm 1% .125 1.6 cents at Digikey"
R24 R25 R26: library part RES1, "RC0805JR-074K7L Yageo 4.7K .125 10% 11 cents at Mouser"
R28: library part RES1, "R0805JR-0710KL Yageo 10k .125 5% 27 cents at Digikey"
SW1: library part "SPSP Switch", "TL3305BF160QG SPST E-Switch Pushbutton Normally Open Tactile 1.5cents at Mouser"
U1: library part STM32, "STM32WB35CEU6ATR"
U2: "BD6231F-E2 Rohm DC Brush Mtr Driver 1.52 at Mouser"
U4: "INA219AIDCNR Current Sensor  1.29 sd at mouser"
U5: library part "3.3 Fixed LDO", "BA33DD0WHFP-TR 3.3Vdc LDO Rohm 2.15 usd at mouser"
U6: library part "6.0 Vdc LDO", "BA00DD0WHFP-TR 6.0Vdc LDO Rohm  1.24 usd at mouser"
U9 X2: library part XTAL, "Pericom 3270004 32KhZ"
U10: library part "IS31FL3193 RGB Drive", "IS31FL3194-CLS2-TR RGB Driver 62 cents at Mouser also look at IS31FL3193 part"
U100: library part "B0509D- 2WR3", "B0509D- 2WR3  DC to DC Boost 5 to 9Vdc 2.80 at Digikey"
U400: "PCF8574 I2C Expander  fix   usd at mouser"
X1: library part XTAL, "ECS-320-12-37B-7KM-TR3   Crystal 12 pF ECX-1637B 7/10ppm  35 crnts at Mouser"

## Free pads (board coordinates)
  round 157.48 hole 118.11: 2(393.3,389.76) 5(2893.3,393.7) 6(1182,983.35) 15(2106.3,2165.35)
  round 196.85 hole 118.11: 3(393.3,2755.91) 3(2893.3,2755.91)
  round 39.37 hole 30: 9(3237.79,637.8) 10(3242.79,973.5) 13(3136.21,637.8) 14(3136.21,968.5)

## Via types
v1: diameter 20, hole 10, Top Layer to Bottom Layer, 190 vias
v2: diameter 40, hole 35, Top Layer to Bottom Layer, 4 vias
v3: diameter 50, hole 28, Top Layer to Bottom Layer, 2 vias
v4: diameter 40, hole 20, Top Layer to Bottom Layer, 1 vias

## Nets (pads, with @x,y where several pads share a name; then routed paths per layer and width w, separated by ;. In a path a pad name is that pad's centre, name@x,y a point inside that pad or via, vN(x,y) a via of type N, cw(c..) or ccw(c..) an arc to the next point about the centre after c; other vN are vias at no path point)
+3.3Vdc: "Jump 4.1" BZ1.2 C1.1 C2.1 C4.1 C21.2 C33.2 C34.1 C152.1 C154.1 C400.2 D1.1 D2.1 D4.1 J1.4 Led1.2 R7.2 R22.1 R24.2 R25.2 R26.2 R28.2 R29.2 R30.2 R200.2 R201.2 R300.2 R301.2 U1.1 U1.8 U1.20 U1.35 U1.48 U5.4 U9.4 U10.2 U400.8 X2.4 | length 2521.5
  Top Layer w10: v1(111.56,3052.51) v1@111.8,3052.28 ; v1(315,2075) 315.59,2075.59 R301.2@315.59,2113.59 ; v1@318.97,1641.03 v1(320,1640) ; v1(325,1420) 326.01,1421.01 R200.2@326.01,1464.37 ; D4.1@459.14,3175.13 459.14,3120.86 v1(460,3120) ; C154.1@574.07,2195.61 574.07,2233.51 v1@574.8,2234.25 ; C33.2@617.6,969.79 C33.2@619.25,968.13 ; C33.2@618.25,965.13 619.25,966.13 C33.2@620.91,966.13 ; v1@679.25,991.13 v1(680.25,990.13) 680.25,980.13 ; 705.25,1213.13 705.62,1213.5 ; R24.2@745.25,927.79 R24.2@745.62,927.42 ; 746.88,1126.5 U10.2@746.88,1141.77 746.88,1170.76 747.25,1171.13 ; 749.25,1124.13 750,1123.39 v1(750,1090) 775.12,1090 C34.1@809.25,1124.13 ; R300.2@752.39,1575.46 752.39,1527.61 v1(755,1525) ; R29.2@854.62,1224.13 R29.2@855.25,1223.5 ; v1(959,1737.54) 959,1737.2 959.24,1737.44 C152.1@987.93,1737.44 ; X2.4@987.24,1702.12 C152.1@987.24,1737.17 ; R7.2@1083.65,2555.43 1083.65,2516.35 v1(1084,2516) v1@1085,2515 ; v1(1100,1495) 1102.09,1492.91 R22.1@1155.68,1492.91 ; D1.1@1115.35,1972.18 1142.18,1972.18 C1.1@1145,1975 ; C2.1@1199.68,1974.68 C2.1@1200,1975 ; C2.1@1205,1965 C2.1@1205.07,1965.07 ; C4.1@1250,1845 C4.1@1255,1840 ; v1(1285,2255) 1285,2254.27 1310.79,2228.48 U1.35@1310.79,2209.17 ; U1.8@1428.9,1937.51 1428.9,1905.9 1445,1889.8 1445,1860 v1(1465,1840) ; U1.20@1535.2,2102.87 1576,2102.87 1593.13,2120 v1(1615,2120) ; U5.4@2970,2093.55 U5.4@2972.53,2091.02 ; v1(2970,2200) 2970.2,2199.8 D2.1@3137.17,2199.8 ; v1(3005,1940) 3007.16,1937.84 C21.2@3007.16,1893.6
  Top Layer w15: v1@111.8,3052.28 BZ1.2@178.19,3052.28 ; v1@318.97,1641.03 R201.2@318.97,1685.24 ; R201.2@320.02,1685.02 U400.8@450.08,1685.02 ; C400.2@465.37,2106.99 465.37,2145.37 520,2200 U9.4@520,2235 ; U9.4@520.83,2236.39 v1(573.83,2236.39) ; C33.2@617.6,969.79 R26.2@617.6,1044.13 ; C33.2@620.91,966.13 666.25,966.13 680.25,980.13 ; 705.25,1213.13 747.25,1171.13 ; 705.62,1213.5 R28.2@705.62,1259.13 ; R25.2@745.62,839.13 R24.2@745.62,927.42 ; R29.2@855.25,1223.5 v1(855.25,1165.13) 869.25,1151.13 869.25,1109.77 R30.2@869.24,1083.76 ; C1.1@1145,1974.68 C2.1@1199.68,1974.68 ; C2.1@1205.07,1965.07 U1.48@1263.54,1965.07 1250,1951.53 ; v1(1250,1920) 1265.51,1935.51 U1.1@1291.21,1935.51
  Top Layer w20: C4.1@1250,1845 v1(1250,1920) 1250,1951.53
  Top Layer w25: U5.4@2970,2093.55 v1(2970,2200)
  Bottom Layer w10: v1(680.25,990.13) 750,1059.88 v1(750,1090)
  other v1: 745.25,883.13
+6.0Vdc: C9.1 C11.1 C20.1 C24.2 R19.2 U2.2 U2.3 U3.12 U3.14 U3.26 U3.28 U4.4 U6.4 | length 5934.8
  Top Layer w10: U3.26@1383.86,475.39 U3.26@1384.57,474.68 ; v1@1461.29,362.71 v1(1462,362) ; v1@1536.32,474.68 v1(1537,474) ; U3.12@1759.02,985 U3.12@1760.5,986.49 ; v1(1760,1075) v1@1760.5,1074.5 ; v1@1874,1174 v1(1875,1175) ; C9.1@2360,195 2360,198.38 C9.1@2360.25,198.63 ; C20.1@2389.98,2701.94 C20.1@2389.98,2704.65 ; v1@2542.53,2167.53 v1(2545,2170) ; v1(2590,1905) v1@2590.6,1905.6
  Top Layer w15: U3.28@1382.87,412.4 1413.39,412.4 1463.08,362.71 v1@1461.29,362.71 ; U3.26@1384.57,474.68 v1@1536.32,474.68 ; U3.12@1759.02,985 1730,985 1720,995 1720,1045 1725,1050 U3.14@1760,1050 ; U3.14@1760.5,1049.48 v1@1760.5,1074.5 ; C11.1@1874,1130.09 v1@1874,1174 ; v1(2491.99,1065.11) 2512.36,1044.74 U4.4@2573.45,1044.74 ; U6.4@2542.53,2091.02 v1@2542.53,2167.53 ; v1@2590.6,1905.6 R19.2@2635.16,1905.6
  Top Layer w25: U2.2@2208.37,308.34 2258.37,308.34 U2.3@2258.37,298.34 2258.37,216.63 2280,195 2360,195 v1(2360,110) ; C24.2@2241.43,2704.65 2389.98,2704.65 v1@2389.98,2769.98
  Signal Layer 1 w10: v1@2490,1065 2490,1067.1 v1(2491.99,1065.11)
  Signal Layer 1 w25: v1(1462,362) 1462,402 v1@1535,475 ; v1(1537,474) 1576,474 1760,658 v1(1760,1075) 1760,1150 1785,1175 v1(1875,1175) 2045,1175 2125,1095 2462.1,1095 2490,1067.1 2490,1805 v1(2590,1905) 2545,1950 v1(2545,2170) 2390,2325 v1(2390,2770) ; v1(2360,110) 2395,110 2630,345 2630,927.1 v1(2491.99,1065.11)
+7.4Vdc: C22.2 C23.2 D3.2 J5.1 U5.1 U5.2 U6.1 U6.2 | length 2189
  Top Layer w10: U6.2@2405,2080 2410.49,2074.51 C22.2@2410.49,1954.2 ; U5.1@2770,2090 2771.02,2091.02 U5.1@2771.74,2091.02 ; U5.2@2830,2100 U5.2@2835,2105 ; D3.2@2917.5,2919.61 2980.39,2919.61 2990,2910 J5.1@3060,2910
  Top Layer w15: C23.2@2716.13,1995.58 2749.42,1995.58 v1(2770,1975) U5.1@2770,2090
  Top Layer w20: U5.1@2771.74,2091.02 U5.2@2830,2091.02
  Top Layer w25: v1(2365,2210) 2341.74,2186.74 U6.1@2341.74,2091.02 U6.2@2405,2091.02 ; U5.2@2835,2105 v1(2835,2265)
  Bottom Layer w25: v1(2365,2210) 2420,2265 v1(2835,2265) 2870,2265 3140,2535 3140,2700 3060.32,2779.68 J5.1@3060.32,2910.01
Charge: J6.A6 J6.A7 J6.B6 J6.B7 | length 102.7
  Top Layer w10: J6.A7@3005.15,821.96 J6.A6@3005.15,802.27 3028.73,802.27 3038.57,792.43 J6.B7@3064.4,792.43 J6.B6@3064.4,812.12
Gnd: C102.2 D2.2 D3.1 D100.1 FB1.1 FB2.1 J5.2 J6.A1 J6.A12 J6.B1 J6.B12 U8.16 U100.1 | length 6115
  Top Layer w10: v1(2605,2700) v1@2605.5,2699.5 ; 2798.43,655 D100.1@2798.43,676.61 ; C102.2@2885,610 C102.2@2885,615 ; v1(2890,2935) 2890.43,2934.57 D3.1@2917.5,2934.57 ; v1(2937.5,1707.57) 2937.5,1701.57 U8.16@2962.69,1676.39 ; J6.A12@3005.15,920.38 3029.62,920.38 3040,910 J6.B1@3065,910 ; 3040,695 J6.B12@3065,695 ; v1@3099.01,694.01 v1(3100,695) ; v1@3099.46,910.54 v1(3100,910) ; v1(3130,2235) 3137.17,2227.83 D2.2@3137.17,2213.57
  Top Layer w15: 2973.85,703.85 J6.A1@3005.15,703.85 3031.15,703.85 3040,695 ; J6.B12@3064.4,694.01 v1@3099.01,694.01 ; J6.B1@3064.4,910.54 v1@3099.46,910.54
  Top Layer w25: FB2.1@2605.5,2638.23 v1@2605.5,2699.5 ; FB2.1@2607.92,2637.92 FB1.1@2686.5,2637.92 ; v1(2775,655) 2798.43,655 2798.43,626.57 2813.39,611.61 C102.2@2881.81,611.61 ; C102.2@2885,615 2973.85,703.85
  Signal Layer 2 w10: v1@2075,3200 v1(2080,3195) ; v1(2605,2700) v1@2605,2705 ; 2611.36,2368.64 2611.36,2625.89 ; 2790,2180 2804,2194 2904,2194 2945,2235 v1(3130,2235)
  Signal Layer 2 w25: v1(2080,3195) 2115,3195 v1@2605,2705 ; 2611.36,2368.64 2784,2196 2784,2166 2915,2035 2915,1730.07 v1(2937.5,1707.57) ; v1(2775,655) 2675,655 2625,705 2625,1010 2560,1075 2560,1890.52 2563.5,1894.02 2563.5,1915.98 2590,1942.48 2590,2360 2605,2375 v1(2605,2700) 2655,2700 v1(2890,2935) 2940,2985 3065,2985 J5.2@3140,2910 ; v1(3100,695) 3115,695 3135,715 3135,875 v1(3100,910)
  Bottom Layer w10: v1@2079.47,3195.53 v1(2080,3195)
  Bottom Layer w15: U100.1@2028.39,3195.53 v1@2079.47,3195.53